# Altium PCB PCB_v1.PcbDoc
Units mil, origin at the board's own origin, x right, y up, seen from the top; angles counter-clockwise.
Board outline 3000 x 3500 mil, 2 copper layers (Top Layer, Bottom Layer); 63 components, 56 nets, 239 pads, 82 vias.
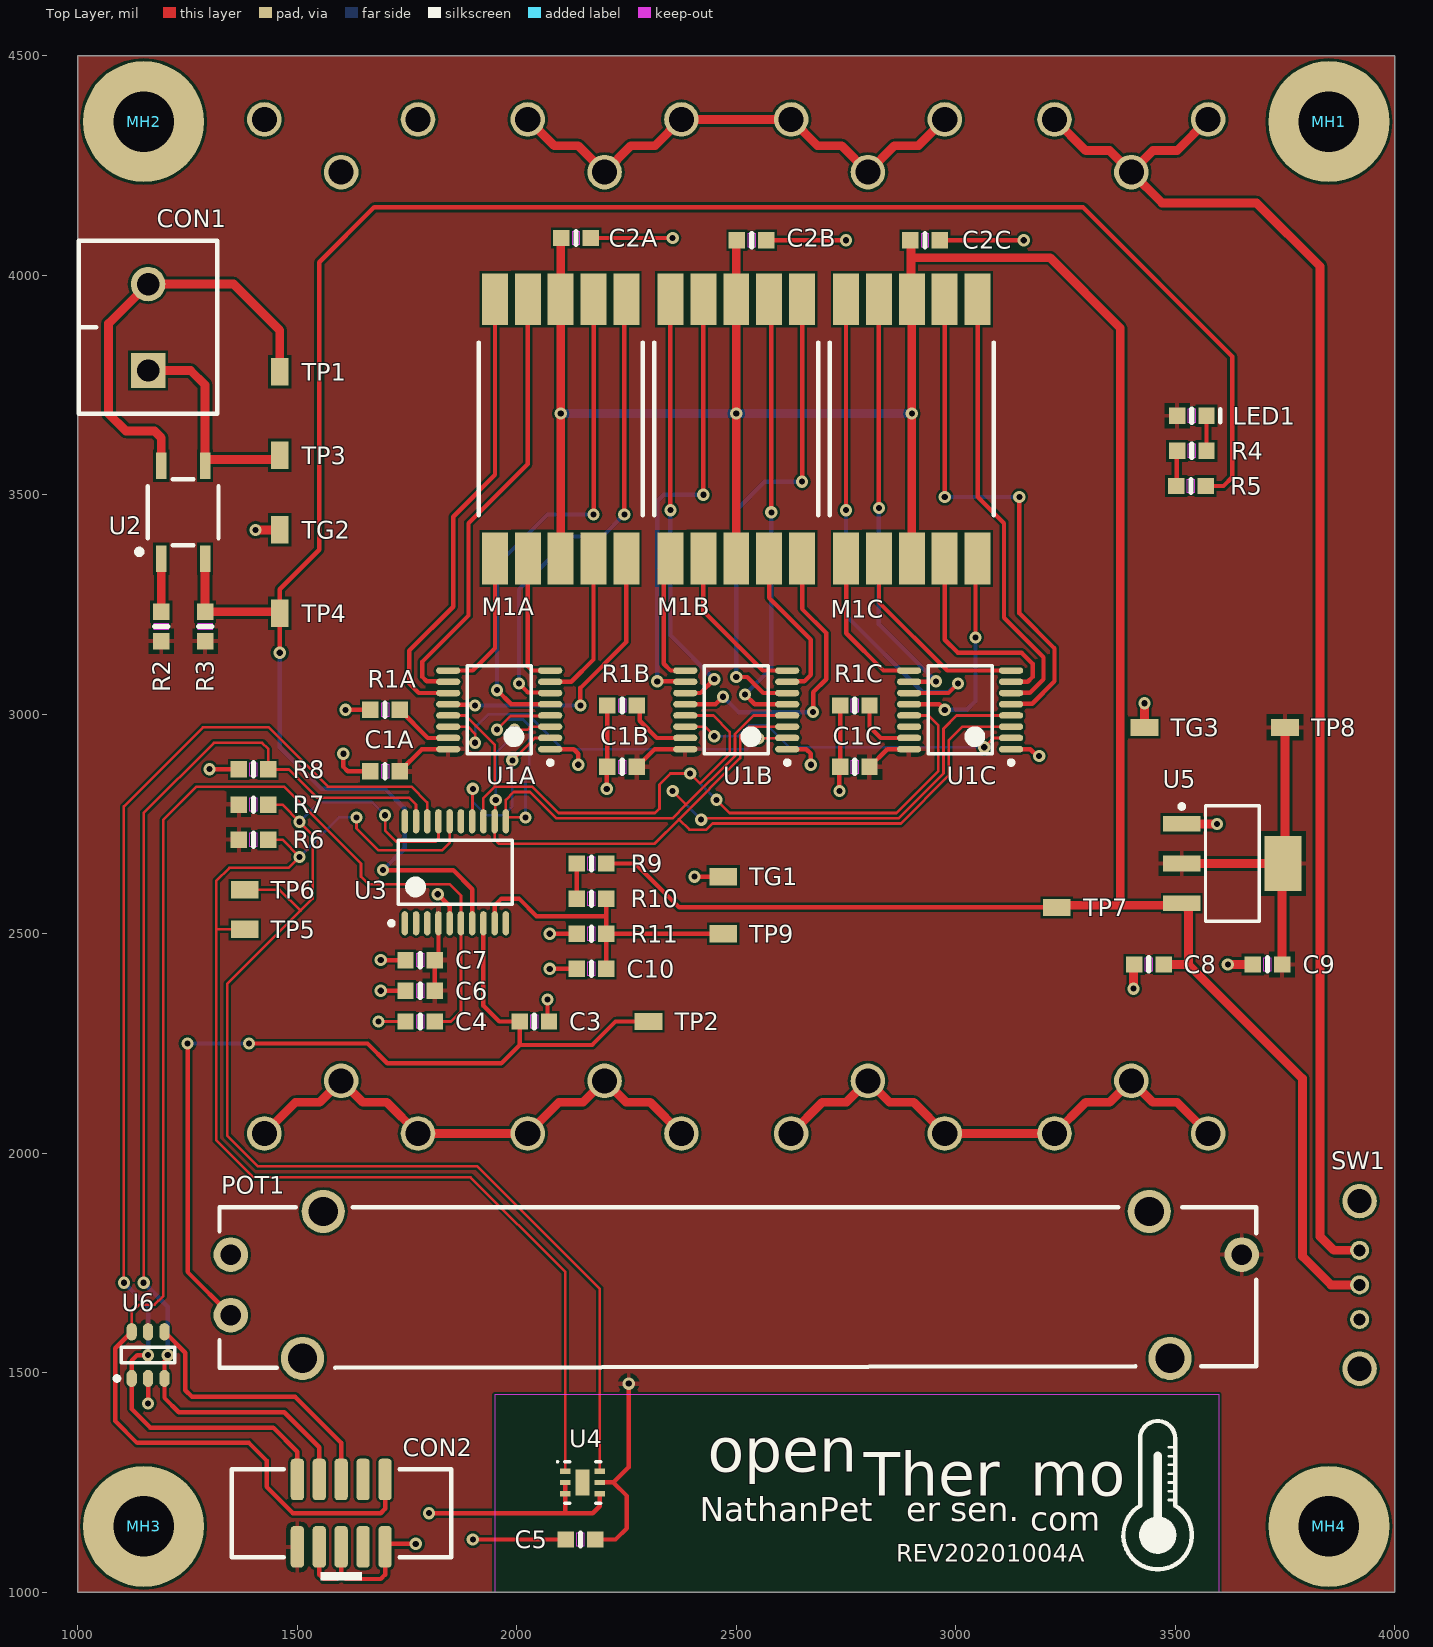
[diagram p0: Top Layer view]
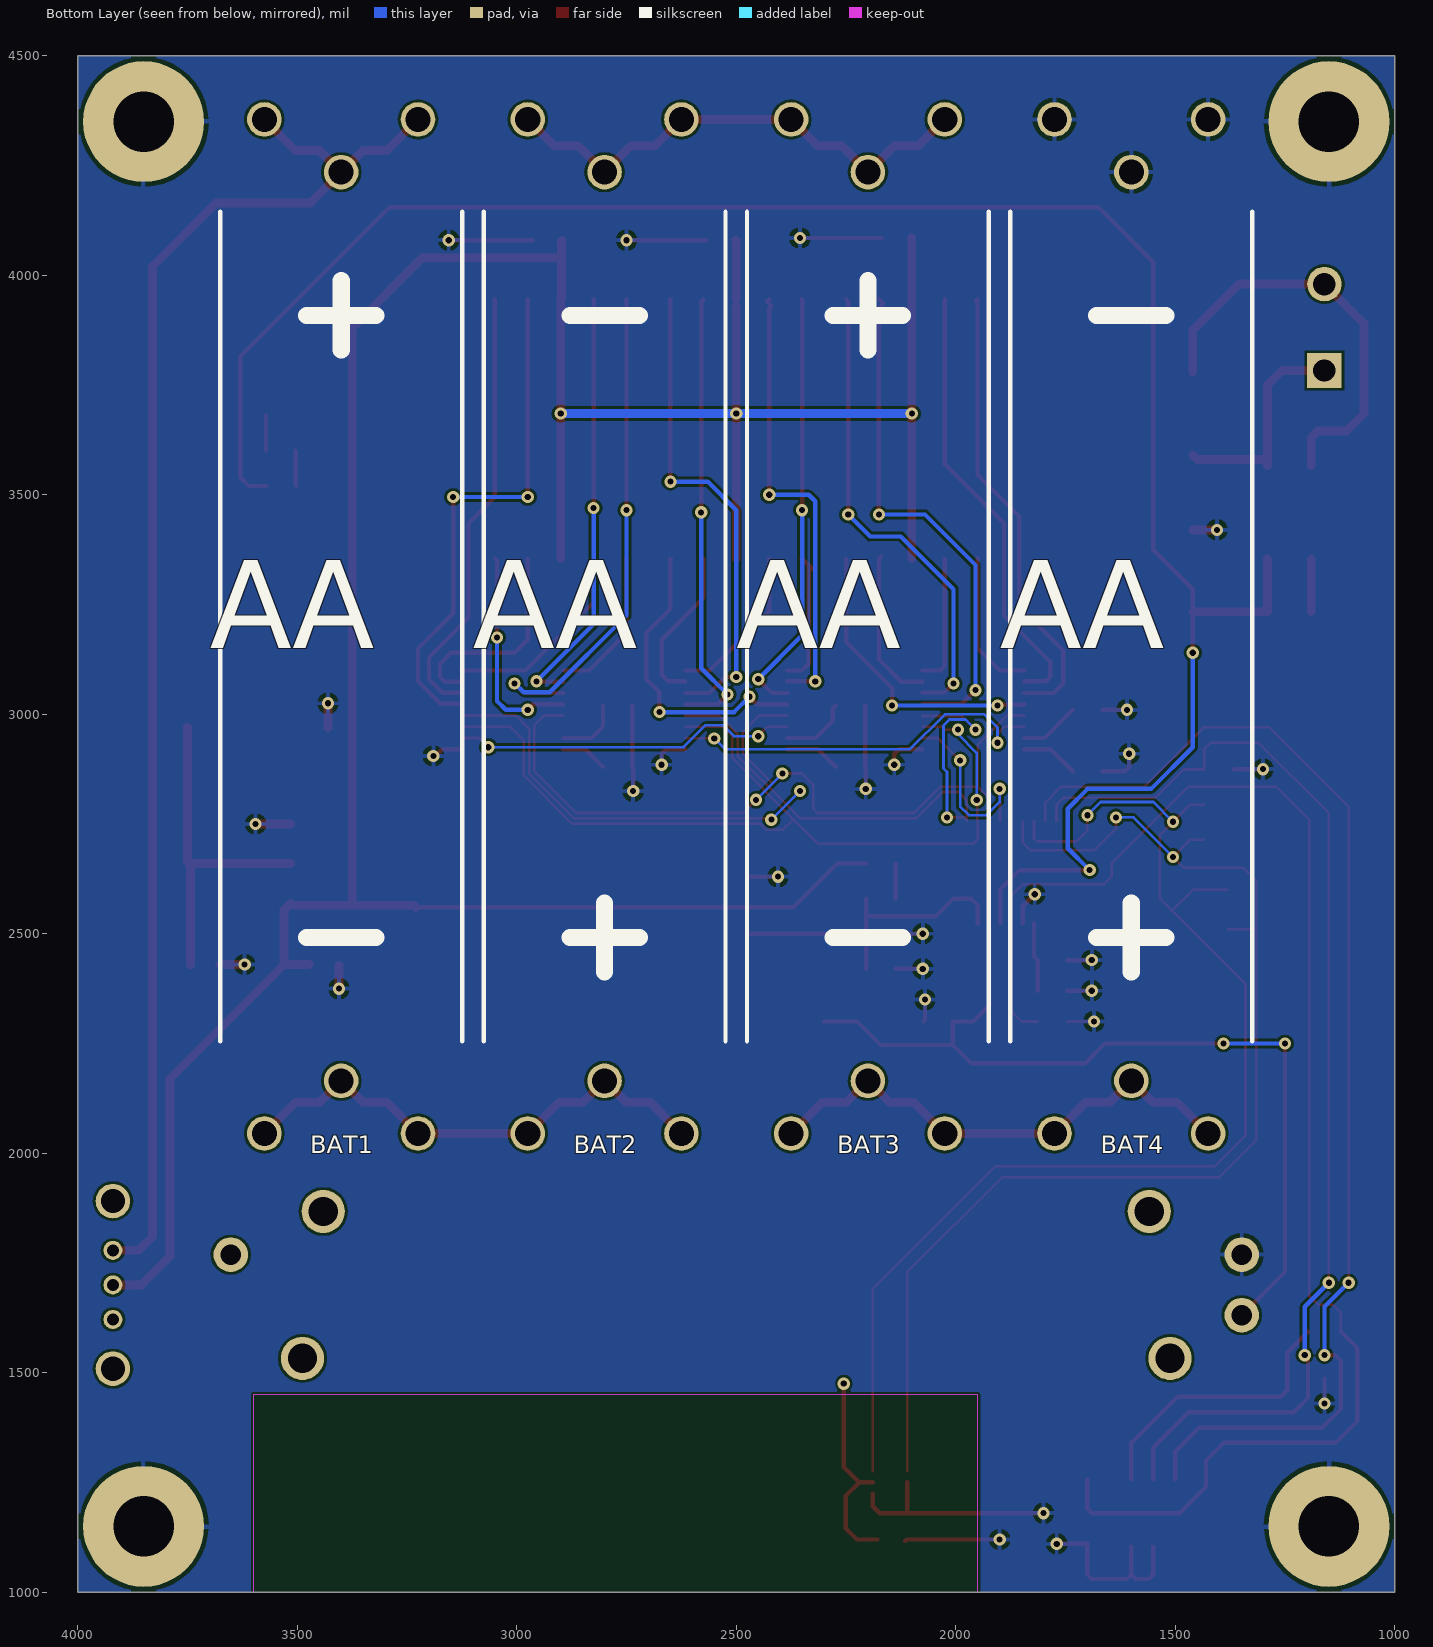
[diagram p1: Bottom Layer view, seen from below]
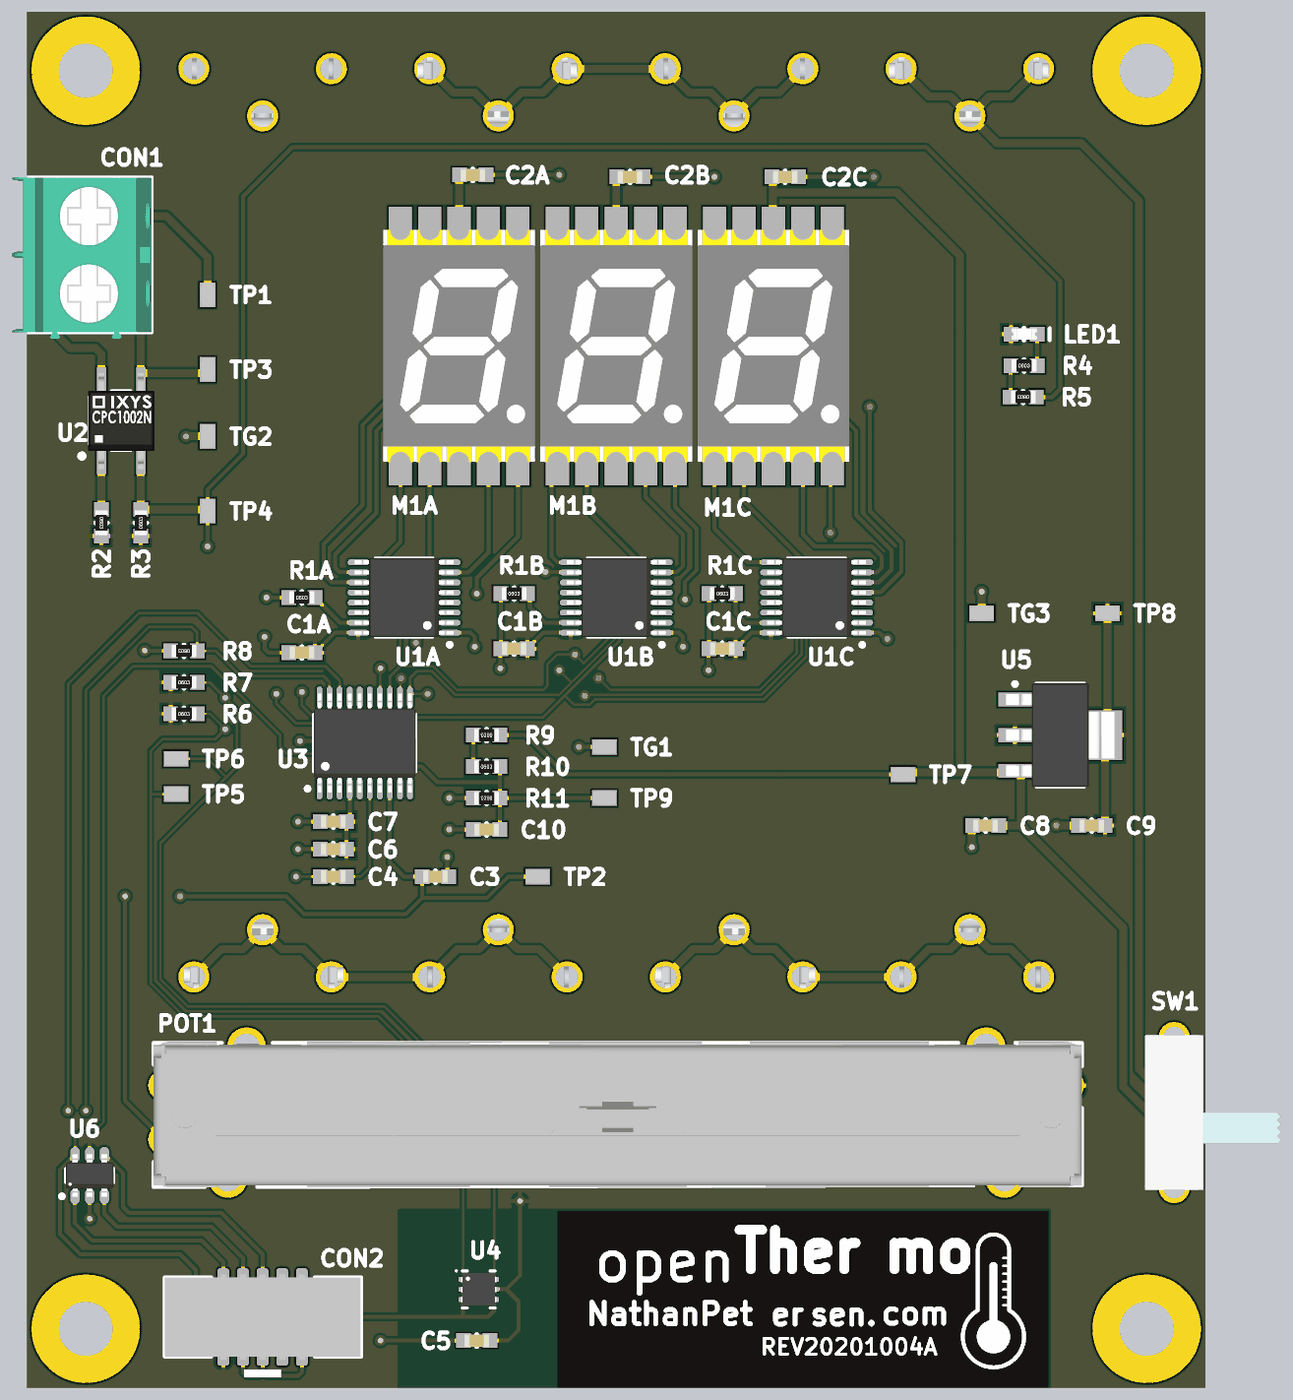
[diagram p2: 3D render of the assembled board from above, using the file's embedded part models]
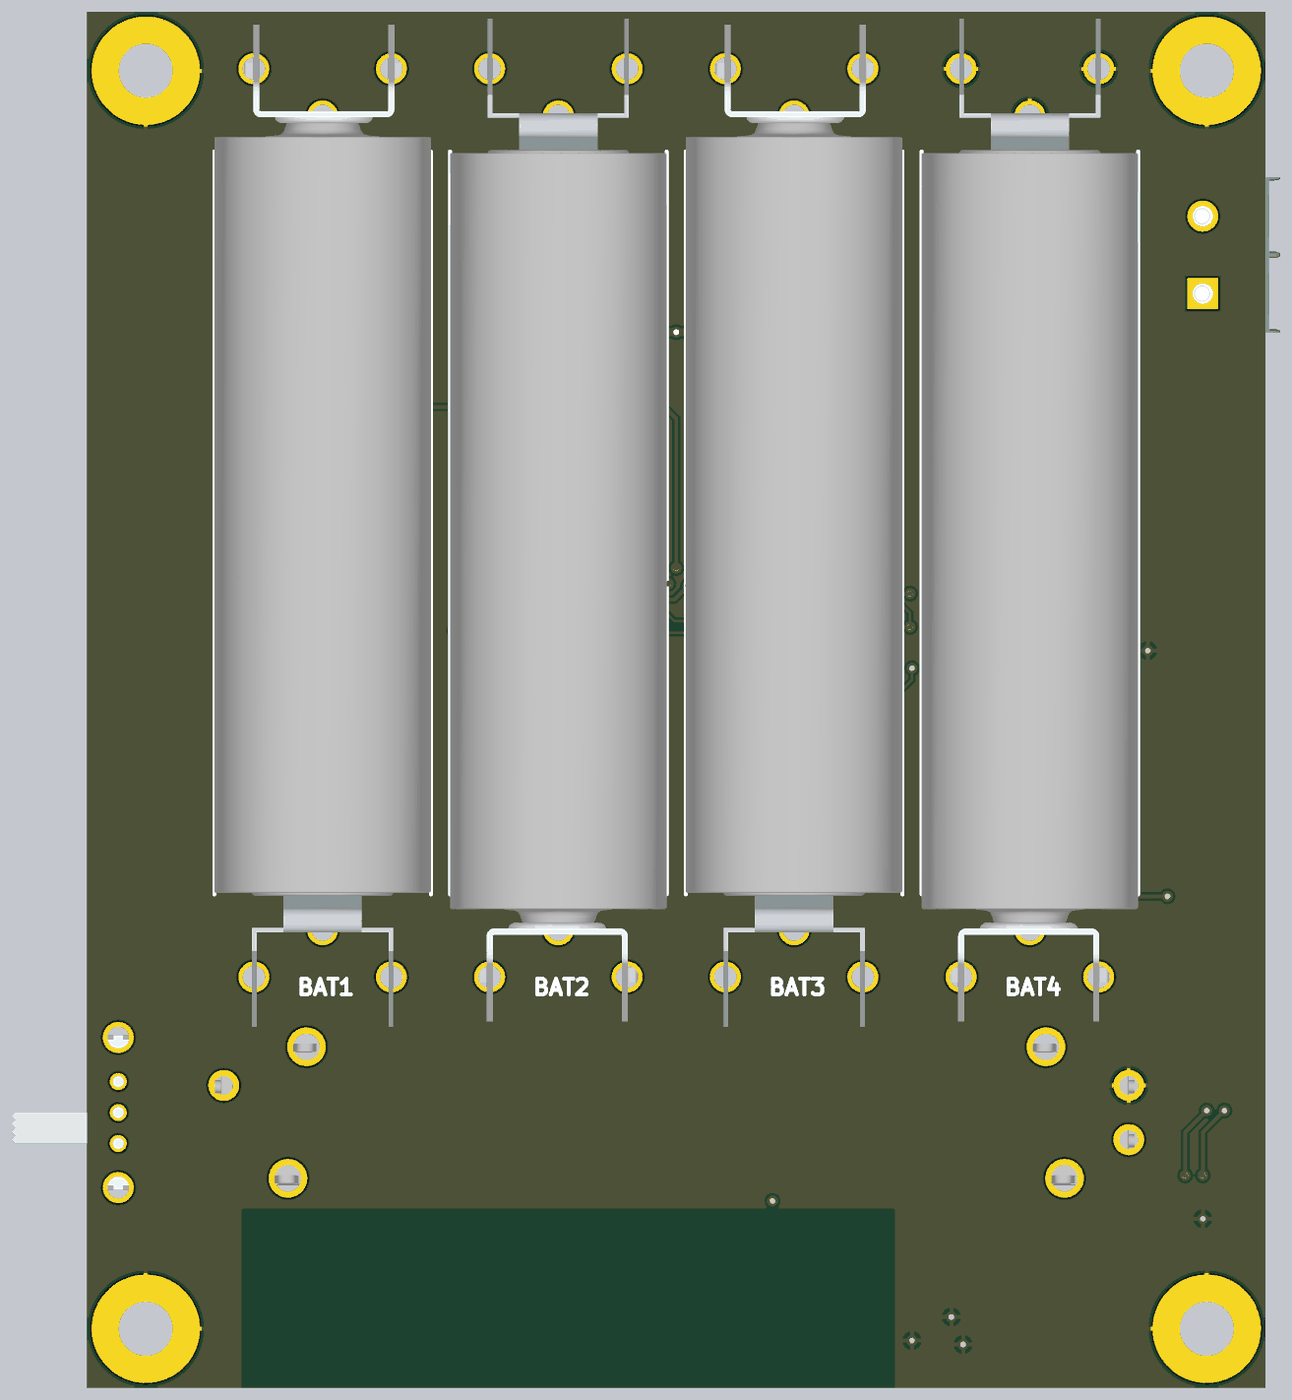
[diagram p3: 3D render of the assembled board from below, using the file's embedded part models]

## Layer stack, top to bottom
Top Solder: solder mask 0.4, Solder Resist, Dk 3.5
Top Layer: signal copper 1.4
Dielectric 1: dielectric 12.6, FR-4, Dk 4.8
Bottom Layer: signal copper 1.4
Bottom Solder: solder mask 0.4, Solder Resist, Dk 3.5

## Board outline
1000,1000 4000,1000 4000,4500 1000,4500

## Design rules (kind name [scope] priority, off if disabled: settings)
Clearance [All] p1: gap=6 ignorepadtopadclearanceinfootprint=FALSE
Height [All] p1: minheight=0 maxheight=5000 prefheight=500
HoleSize [All] p1: absolutevalues=TRUE maxlimit=250 minlimit=14 maxpercent=80.000 minpercent=20.000
MinimumSolderMaskSliver [All] p1: minsoldermaskwidth=6
PolygonConnect [All] p1: connectstyle=Relief reliefconductorwidth=10 reliefentries=4 polygonreliefangle="90 Angle" airgapwidth=10
RoutingVias [All] p1: holewidth=14 width=28 viastyle="Through Hole" minholewidth=14 minwidth=28 maxholewidth=28 maxwidth=50
SilkToSilkClearance [All] p1: silktosilkclearance=0
SilkToSolderMaskClearance [IsPad] p1: minsilkscreentomaskgap=6 clearancetoexposedcopper=TRUE
SolderMaskExpansion [All] p1: expansion=4
Width [All] p1: maxlimit=100 minlimit=6 preferedwidth=6
25 further rules are at their usual default settings.

## Classes and differential pairs
channel class LED_7_Seg: U_LED_7_Seg_0 U_LED_7_Seg_1 U_LED_7_Seg_2
component class U_LED_7_Seg_2: C1C C2C M1C R1C U1C
component class U_LED_7_Seg_1: C1B C2B M1B R1B U1B
component class U_LED_7_Seg_0: C1A C2A M1A R1A U1A
component class Schematic: BAT1 BAT2 BAT3 BAT4 C3 C4 C5 C6 C7 C8 C9 C10 CON1 CON2 LED1 MH1 MH2 MH3 MH4 POT1 R2 R3 R4 R5 R6 R7 R8 R9 R10 R11 SW1 TG1 TG2 TG3 TP1 TP2 TP3 TP4 TP5 TP6 TP7 TP8 TP9 U2 U3 U4 U5 U6

## Components (designator, comment, footprint, x,y, rotation, side; value= is the part's Value field where it differs from the comment)
BAT1 "AA" AA_BATTERY 3400,3200 r270 bottom locked
BAT2 "AA" AA_BATTERY 2800,3200 r90 bottom locked
BAT3 "AA" AA_BATTERY 2200,3200 r270 bottom locked
BAT4 "AA" AA_BATTERY 1600,3200 r90 bottom locked
C1A "Capacitor" 0603-CAP 1700,2870 r180 top value=0.1uF (schematic designator C1)
C1B "Capacitor" 0603-CAP 2240,2880 r180 top value=0.1uF (schematic designator C1)
C1C "Capacitor" 0603-CAP 2770,2880 r180 top value=0.1uF (schematic designator C1)
C2A "Capacitor" 0603-CAP 2135,4085 r0 top value=0.1uF (schematic designator C2)
C2B "Capacitor" 0603-CAP 2535,4080 r0 top value=0.1uF (schematic designator C2)
C2C "Capacitor" 0603-CAP 2930,4080 r0 top value=0.1uF (schematic designator C2)
C3 "Capacitor" 0603-CAP 2040,2300 r0 top value=10uF
C4 "Capacitor" 0603-CAP 1780,2300 r0 top value=0.1uF
C5 "Capacitor" 0603-CAP 2145,1120 r180 top value=0.1uF
C6 "Capacitor" 0603-CAP 1780,2370 r180 top value=0.1uF
C7 "Capacitor" 0603-CAP 1780,2440 r180 top value=10uF
C8 "Capacitor" 0603-CAP 3440,2430 r180 top value=10uF
C9 "Capacitor" 0603-CAP 3710,2430 r180 top value=10uF
C10 "Capacitor" 0603-CAP 2170,2420 r180 top value=0.1uF
CON1 "ScrewTerminal_1x2" 1935161 1160,3881.57 r90 top
CON2 "20021521-00010D4LF" 20021521-00010D4LF 1600,1180 r0 top
LED1 "RED" 0603-LED 3537.87,3680 r180 top
M1A "VDMR10A0" VDMR10A0 2100,3650 r0 top locked (schematic designator M1)
M1B "VDMR10A0" VDMR10A0 2500,3650 r0 top locked (schematic designator M1)
M1C "VDMR10A0" VDMR10A0 2900,3650 r0 top locked (schematic designator M1)
MH1 "M3" M3_HOLE 3850,4350 r0 top
MH2 "M3" M3_HOLE 1150,4350 r0 top
MH3 "M3" M3_HOLE 1150,1150 r0 top
MH4 "M3" M3_HOLE 3850,1150 r0 top
POT1 "PTA4543-2010CIB103" PTA4543-2010CIB103 2500,1700 r0 top locked value=10k
R1A "Resistor" 0603-RES 1700,3010 r0 top value=4k7 (schematic designator R1)
R1B "Resistor" 0603-RES 2240,3020 r0 top value=4k7 (schematic designator R1)
R1C "Resistor" 0603-RES 2770,3020 r0 top value=4k7 (schematic designator R1)
R2 "Resistor" 0603-RES 1190,3200 r270 top value=470
R3 "Resistor" 0603-RES 1290,3200 r90 top value=10k
R4 "Resistor" 0603-RES 3537.87,3600 r0 top value=1k
R5 "Resistor" 0603-RES 3535.75,3520 r180 top value=1k
R6 "Resistor" 0603-RES 1400,2714.25 r0 top value=4k7
R7 "Resistor" 0603-RES 1400,2794.25 r0 top value=4k7
R8 "Resistor" 0603-RES 1400,2874.25 r180 top value=10k
R9 "Resistor" 0603-RES 2170,2660 r180 top value=10k
R10 "Resistor" 0603-RES 2170,2580 r0 top value=10k
R11 "Resistor" 0603-RES 2170,2500 r180 top value=10k
SW1 "EG1213" EG1213 3920,1700 r90 top
TG1 "RCU-0C" RCU-0C 2470,2630 r90 top
TG2 "RCU-0C" RCU-0C 1460,3420 r0 top
TG3 "RCU-0C" RCU-0C 3430,2970 r90 top
TP1 "RCU-0C" RCU-0C 1460,3780 r0 top
TP2 "RCU-0C" RCU-0C 2300,2300 r90 top
TP3 "RCU-0C" RCU-0C 1460,3590 r0 top
TP4 "RCU-0C" RCU-0C 1460,3230 r0 top
TP5 "RCU-0C" RCU-0C 1380,2510 r90 top
TP6 "RCU-0C" RCU-0C 1380,2600 r90 top
TP7 "RCU-0C" RCU-0C 3230,2560 r90 top
TP8 "RCU-0C" RCU-0C 3750,2970 r90 top
TP9 "RCU-0C" RCU-0C 2470,2500 r90 top
U1A "STP08DP05TTR" TSOP65P640X120-16N 1960,3010 r180 top (schematic designator U1)
U1B "STP08DP05TTR" TSOP65P640X120-16N 2500,3010 r180 top (schematic designator U1)
U1C "STP08DP05TTR" TSOP65P640X120-16N 3010,3010 r180 top (schematic designator U1)
U2 "CPC1002NTR" CPC1002NTR 1240,3460 r0 top
U3 "STM32G030F6P6" TSOP65P640X120-20N 1860,2640 r90 top
U4 "TMP117MAIDRVR" SON65P200X80_HS-7N 2150,1250 r0 top
U5 "AP2114H-3.3TRG1" SOT230P700X180-4N 3630,2660 r0 top
U6 "NUP4114HMR6T1G" TSOP95P280X110-6N 1160,1540 r90 top

## Footprints (in the part's own frame and the unit in brackets; to place one, negate y for a bottom-side part, rotate by r counter-clockwise, add the part's x,y. Pads: shape width x height; smd on the part's side, far side on the other; paste and mask are expansions set on the pad)
0603-CAP [mm]
  rect 0.95x0.95 smd: 1(-0.85,0) 2(0.85,0)
  Top Layer keep-out region: -0.2,0.4 0.2,0.4 0.2,-0.4 -0.2,-0.4
  silkscreen extent 0,-0.38 0,0.38, body extent -0.8,-0.4 0.8,0.4, height 0.79
0603-LED [mm]
  rect 0.95x0.95 smd: A(0.85,0) C(-0.85,0)
  Top Layer keep-out region: -0.2,0.4 0.2,0.4 0.2,-0.4 -0.2,-0.4
  silkscreen extent -1.65,-0.38 0,0.38, body extent -0.83,-0.37 0.82,0.81, height 0.8
0603-RES [mm]
  rect 0.95x0.95 smd: 1(-0.85,0) 2(0.85,0)
  Top Layer keep-out region: -0.2,0.4 0.2,0.4 0.2,-0.4 -0.2,-0.4
  silkscreen extent 0,-0.38 0,0.38, body extent -0.8,-0.4 0.8,0.4, height 0.44
1935161 [mm] "TERM BLOCK PCB 2POS 5.0MM GREEN"
  rect 2x2 hole 1.3: 1(-2.5,0)
  round 2 hole 1.3: 2(2.5,0)
  silkscreen extent -5,-4 5,4, body extent -5.4,-4 5,5, height 11.5
20021521-00010D4LF [mm] "CONN HEADER SMD 10POS 1.27MM"
  rrect50% 0.76x2.4 smd: 1(-2.54,-1.95) 2(-2.54,1.95) 3(-1.27,-1.95) 4(-1.27,1.95) 5(0,-1.95) 6(0,1.95) 7(1.27,-1.95) 8(1.27,1.95) 9(2.54,-1.95) 10(2.54,1.95)
  silkscreen extent -6.32,-3.9 6.38,2.55, body extent -6.32,-2.75 6.33,2.75, height 5.65
AA_BATTERY [mm]
  round 2 hole 1.45: 1(-29.34,-4.445) 1(-29.34,4.445) 1(-26.29,0) 2(26.29,0) 2(29.34,-4.445) 2(29.34,4.445)
  silkscreen extent -24,-7 24,7, body extent -32.2,-7 32.56,7, height 14
CPC1002NTR [mm] "SSR RELAY SPST-NO 700MA 0-60V"
  rect 0.6x1.54 smd: 1(-1.27,-2.695) 2(1.27,-2.695) 3(1.27,2.695) 4(-1.27,2.695)
  silkscreen extent -2.69,-2.44 2.04,1.91, body extent -2.14,-3.12 2.15,3.07, height 2.18
EG1213 [mm] "SWITCH SLIDE SPDT 200MA 30V"
  round 1.1 hole 0.7: 1(-2,0) 2(0,0) 3(2,0)
  round 2 hole 1.4: SH(-4.85,0) SH(4.85,0)
  body extent -5,-6.9 5,1.9, height 5
M3_HOLE [mm]
  round 7 hole 3.5: 1(0,0)
PTA4543-2010CIB103 [mm] "SLIDE POT 10K OHM 0.25W TOP 45MM"
  round 2 hole 1.2: 1(-29.25,1.75) 2(-29.25,-1.75) 3(29.25,1.75)
  round 2.5 hole 1.7: SH(-25.1,-4.25) SH(-23.9,4.25) SH(23.9,4.25) SH(25.1,-4.25)
  silkscreen extent -29.9,-4.8 30.1,4.5, body extent -29.9,-8.37 30.1,6.17, height 17.09
RCU-0C [mm] "0603 PROBE PAD"
  rect 1x1.6 smd: 1(0,0)
  body extent -0.44,-0.8 0.46,0.8, height 1.12
SON65P200X80_HS-7N [mm] "SON, 6-Leads, Body 2.00x2.00mm, Pitch 0.65mm, Thermal Pad 1.60x0.89mm, IPC Medium Density"
  rect 0.6x0.3 smd mask+0.05: 1(-0.995,0.65) 2(-0.995,0) 3(-0.995,-0.65) 4(0.995,-0.65) 5(0.995,0) 6(0.995,0.65)
  rect 0.8x1.5 smd mask+0.05: 7(0,0)
  silkscreen extent -1.5,-1.2 1.05,1.25, body extent -1.13,-1.05 1.13,1.05, height 0.8
SOT230P700X180-4N [mm] "SOT223, 4-Leads, Body 6.50x7.00mm (avg), Pitch 2.30mm, IPC Medium Density"
  rect 2.15x0.9 smd: 1(-2.925,2.3) 2(-2.925,0) 3(-2.925,-2.3)
  rect 2.15x3.2 smd: 4(2.925,0)
  silkscreen extent -3.05,-3.35 1.55,3.42, body extent -3.5,-3.35 3.5,3.35, height 1.8
TSOP65P640X120-16N [mm] "TSOP, 16-Leads, Body 5.00x4.40mm, Pitch 0.65mm, IPC Medium Density"
  oval 1.4x0.375 smd mask+0.05: 1(-2.95,2.275) 2(-2.95,1.625) 3(-2.95,0.975) 4(-2.95,0.325) 5(-2.95,-0.325) 6(-2.95,-0.975) 7(-2.95,-1.625) 8(-2.95,-2.275) 9(2.95,-2.275) 10(2.95,-1.625) 11(2.95,-0.975) 12(2.95,-0.325) 13(2.95,0.325) 14(2.95,0.975) 15(2.95,1.625) 16(2.95,2.275)
  silkscreen extent -3.08,-2.55 1.85,3.17, body extent -3.2,-2.55 3.2,2.55, height 1.2
TSOP65P640X120-20N [mm] "TSOP, 20-Leads, Body 6.50x4.40mm, Pitch 0.65mm, IPC Medium Density"
  oval 1.4x0.375 smd mask+0.05: 1(-2.95,2.925) 2(-2.95,2.275) 3(-2.95,1.625) 4(-2.95,0.975) 5(-2.95,0.325) 6(-2.95,-0.325) 7(-2.95,-0.975) 8(-2.95,-1.625) 9(-2.95,-2.275) 10(-2.95,-2.925) 11(2.95,-2.925) 12(2.95,-2.275) 13(2.95,-1.625) 14(2.95,-0.975) 15(2.95,-0.325) 16(2.95,0.325) 17(2.95,0.975) 18(2.95,1.625) 19(2.95,2.275) 20(2.95,2.925)
  silkscreen extent -3.07,-3.3 1.85,3.82, body extent -3.2,-3.3 3.2,3.3, height 1.2
TSOP95P280X110-6N [mm] "TSOP, 6-Leads, Body 3.00x1.50mm, Pitch 0.95mm, IPC Medium Density"
  oval 1x0.6 smd mask+0.051: 1(-1.35,0.95) 2(-1.35,0) 3(-1.35,-0.95) 4(1.35,-0.95) 5(1.35,0) 6(1.35,0.95)
  silkscreen extent -1.47,-1.55 0.45,1.92, body extent -1.38,-1.55 1.38,1.55, height 1.1
VDMR10A0 [mm] "DISPLAY 7SEG 0.39\" SGL RED 10SMD"
  rect 1.5x3 smd: 1(-3.8,-7.5) 2(-1.9,-7.5) 3(0,-7.5) 4(1.9,-7.5) 5(3.8,-7.5) 6(3.8,7.5) 7(1.9,7.5) 8(0,7.5) 9(-1.9,7.5) 10(-3.8,7.5)
  silkscreen extent -4.75,-5 4.75,5, body extent -4.9,-7.5 4.9,7.5, height 3.84

## Part data
BAT1 BAT2 BAT3 BAT4: library part AA_BATTERY, "AA BATTERY", Supplier Part Number 1=36-590-ND, Supplier 1=Digi-Key, Supplier Part Number 2=36-596-ND
C1A C1B C1C C2A C2B C2C C4 C5 C6 C10: Supplier Part Number 1=311-1343-1-ND, Supplier 1=Digi-Key
C3 C7 C8 C9: Supplier Part Number 1=1276-1192-1-ND, Supplier 1=Digi-Key
CON1: Supplier Part Number 1=277-1667-ND, Supplier 1=Digi-Key
CON2: "CONN HEADER SMD 10POS 1.27MM", Supplier Part Number 1=609-6533-ND, Supplier 1=Digi-Key
LED1: library part LED, Supplier Part Number 1=160-1447-6-ND, Supplier 1=Digi-Key
M1A M1B M1C: "DISPLAY 7SEG 0.39\" SGL RED 10SMD", Supplier Part Number 1=VDMR10A0CT-ND, Supplier 1=Digi-Key
MH1 MH2 MH3 MH4: library part M3_HOLE, "M3 MOUNTING HOLE"
POT1: "SLIDE POT 10K OHM 0.25W TOP 45MM", Supplier Part Number 1=PTA4543-2010CIB103-ND, Supplier 1=Digi-Key
R1A R1B R1C R6 R7: Supplier Part Number 1=YAG1304CT-ND, ComponentLink1Description=https://www.seielect.com/catalog/SEI-RMCF_RMCP.pdf?src-supplier=Avnet, ComponentLink1URL=https://www.seielect.com/catalog/SEI-RMCF_RMCP.pdf?src-supplier=Avnet, ComponentLink2Description=http://components.arrow.com/part/dataview/50497142S181428N1174?src-supplier=Arrow, ComponentLink2URL=http://components.arrow.com/part/dataview/50497142S181428N1174?src-supplier=Arrow, ComponentLink3Description=https://www.seielect.com/catalog/SEI-Packaging.pdf?src-supplier=Digi-Key, ComponentLink3URL=https://www.seielect.com/catalog/SEI-Packaging.pdf?src-supplier=Digi-Key, Supplier 1=Digi-Key
R2: Supplier Part Number 1=311-470HRCT-ND, ComponentLink1Description=https://www.seielect.com/catalog/SEI-RMCF_RMCP.pdf?src-supplier=Avnet, ComponentLink1URL=https://www.seielect.com/catalog/SEI-RMCF_RMCP.pdf?src-supplier=Avnet, ComponentLink2Description=http://components.arrow.com/part/dataview/50497142S181428N1174?src-supplier=Arrow, ComponentLink2URL=http://components.arrow.com/part/dataview/50497142S181428N1174?src-supplier=Arrow, ComponentLink3Description=https://www.seielect.com/catalog/SEI-Packaging.pdf?src-supplier=Digi-Key, ComponentLink3URL=https://www.seielect.com/catalog/SEI-Packaging.pdf?src-supplier=Digi-Key, Supplier 1=Digi-Key
R3 R8 R9 R10 R11: Supplier Part Number 1=311-10.0KHRCT-ND, ComponentLink1Description=https://www.seielect.com/catalog/SEI-RMCF_RMCP.pdf?src-supplier=Avnet, ComponentLink1URL=https://www.seielect.com/catalog/SEI-RMCF_RMCP.pdf?src-supplier=Avnet, ComponentLink2Description=http://components.arrow.com/part/dataview/50497142S181428N1174?src-supplier=Arrow, ComponentLink2URL=http://components.arrow.com/part/dataview/50497142S181428N1174?src-supplier=Arrow, ComponentLink3Description=https://www.seielect.com/catalog/SEI-Packaging.pdf?src-supplier=Digi-Key, ComponentLink3URL=https://www.seielect.com/catalog/SEI-Packaging.pdf?src-supplier=Digi-Key, Supplier 1=Digi-Key
R4 R5: Supplier Part Number 1=311-1.00KHRCT-ND, ComponentLink1Description=https://www.seielect.com/catalog/SEI-RMCF_RMCP.pdf?src-supplier=Avnet, ComponentLink1URL=https://www.seielect.com/catalog/SEI-RMCF_RMCP.pdf?src-supplier=Avnet, ComponentLink2Description=http://components.arrow.com/part/dataview/50497142S181428N1174?src-supplier=Arrow, ComponentLink2URL=http://components.arrow.com/part/dataview/50497142S181428N1174?src-supplier=Arrow, ComponentLink3Description=https://www.seielect.com/catalog/SEI-Packaging.pdf?src-supplier=Digi-Key, ComponentLink3URL=https://www.seielect.com/catalog/SEI-Packaging.pdf?src-supplier=Digi-Key, Supplier 1=Digi-Key
SW1: "SWITCH SLIDE SPDT 200MA 30V", Supplier Part Number 1=EG1906-ND, Supplier 1=Digi-Key
TG1 TG2 TG3 TP1 TP2 TP3 TP4 TP5 TP6 TP7 TP8 TP9: library part CMP-2000-05575-1, "PC TEST POINT NATURAL", Supplier Part Number 1=A106145CT-ND, ComponentLink1Description=https://datasheet.ciiva.com/2917/5000-5004-2917632.pdf?src-supplier=Digi-Key, ComponentLink1URL=https://datasheet.ciiva.com/2917/5000-5004-2917632.pdf?src-supplier=Digi-Key, ComponentLink2Description=https://datasheet.ciiva.com/16507/m60-2p60-16507925.pdf?src-supplier=Future+Electronics, ComponentLink2URL=https://datasheet.ciiva.com/16507/m60-2p60-16507925.pdf?src-supplier=Future+Electronics, ComponentLink3Description=https://datasheet.ciiva.com/1454/1703983-1454827.pdf?src-supplier=Element14, ComponentLink3URL=https://datasheet.ciiva.com/1454/1703983-1454827.pdf?src-supplier=Element14, Supplier 1=Digi-Key
U1A U1B U1C: "IC LED DRIVER LIN 100MA 16TSSOP", Supplier Part Number 1=497-6029-1-ND, Supplier 1=Digi-Key
U2: "SSR RELAY SPST-NO 700MA 0-60V", Supplier Part Number 1=CLA230CT-ND, Supplier 1=Digi-Key
U3: "ARM MICROCONTROLLERS - MCU", Supplier Part Number 1=497-STM32G030F6P6-ND, Supplier 1=Digi-Key
U4: "TEMPERATURE SENSOR", Supplier Part Number 1=296-51835-1-ND, Supplier 1=Digi-Key
U5: "IC REG LINEAR 3.3V 1A SOT223", Supplier Part Number 1=AP2114H-3.3TRG1DICT-ND, Supplier 1=Digi-Key
U6: "TVS DIODE 5.5V 10V 6TSOP", Supplier Part Number 1=NUP4114HMR6T1GOSCT-ND, Supplier 1=Digi-Key

## Via types
v1: diameter 28, hole 14, Top Layer to Bottom Layer, tented both sides, 82 vias

## Nets (pads, with @x,y where several pads share a name; then routed paths per layer and width w, separated by ;. In a path a pad name is that pad's centre, name@x,y a point inside that pad or via, vN(x,y) a via of type N, cw(c..) or ccw(c..) an arc to the next point about the centre after c; other vN are vias at no path point)
3V3: C1A.1 C1B.1 C1C.1 C5.1 C6.1 C7.1 C9.1 CON2.1 LED1.A POT1.3 R2.2 R3.1 R6.1 R7.1 TP8.1 U1A.16 U1B.16 U1C.16 U3.4 U4.5 U5.2 U5.4 U6.5 | length 1762.8
  Top Layer w10: C1A.1 1783.9,2920.43 U1A.16 ; C6.1 C7.1 1821.61,2448.15 U3.4 ; C5.1 2225,1120 2250.86,1145.86 2250.86,1219.14 2220,1250 ; U4.5 2220,1250 ; v1(2255,1475) 2255,1285 2220,1250 ; C1B.1 2313.9,2920.43 U1B.16 ; C1C.1 2843.9,2920.43 U1C.16
  Top Layer w20: U5.2 3741.77,2660 3743.46,2658.31 C9.1 ; U5.4 3750,2664.84 TP8.1
CLK: U1A.3 U1B.3 U1C.3 U3.12 | length 2073.3
  Top Layer w6: v1(1952.16,2804.63) 1950.86,2803.34 1950.86,2757.44 U3.12 1949.57,2715.43 1960,2705 2313.94,2705 2369.47,2760.53 ; v1(1995,2965) 2025,2965 2031.61,2971.61 U1A.3 ; U1B.3 2530.58,2971.61 2509,2950.03 2509,2900.06 2369.47,2760.53 ; U1C.3 3015.61,2971.61 2984,2940 2984,2860.06 2874.94,2751 2446,2751 2432,2737 2393,2737 2369.47,2760.53
  Bottom Layer w6: v1(1952.16,2804.63) 1952.16,2912.16 1995,2955 v1(1995,2965)
GND: BAT4.2 C1A.2 C1B.2 C1C.2 C2A.2 C2B.2 C2C.2 C3.2 C4.1 C5.2 C6.2 C7.2 C8.2 C9.2 C10.2 CON2.3 CON2.5 CON2.9 MH1.1 MH2.1 MH3.1 MH4.1 POT1.1 R1A.1 R1B.1 R1C.1 R8.2 R11.2 TG1.1 TG2.1 TG3.1 U1A.1 U1B.1 U1C.1 U3.5 U4.2 U4.3 U4.4 U5.1 U6.2 | length 3406.6
  Top Layer w6: v1(1685,2300) C4.1
  Top Layer w10: v1(1160,1430) U6.2 ; v1(1300,2875) 1365.79,2875 R8.2 ; CON2.3 1550,1040 1560,1030 1590,1030 1600,1040 ; CON2.5 1600,1040 ; v1(1605,2910) 1605,2880 1615,2870 C1A.2 ; v1(1610,3010) R1A.1 ; v1(1690,2370) C6.2 ; v1(1690,2440) C7.2 ; v1(1770,1110) 1700,1110 CON2.9 1700,1040 1690,1030 1610,1030 1600,1040 ; v1(1800,1180) 2110,1180 ; v1(1820,2590) 1847.2,2562.8 U3.5 ; v1(1900,1120) C5.2 C5.2@2115,1116.54 ; v1(2070,2350) 2070,2303.46 C3.2 ; v1(2075,2420) C10.2 ; v1(2075,2500) R11.2 ; U1A.1 2129.57,2920.43 2140,2910 v1(2140,2885) ; U4.2 U4.3 2110.41,1224 2110.41,1180.41 2110,1180 ; C2A.2 v1(2355,4085) ; U4.4 2189.17,1195.83 2173.35,1180 2110,1180 ; v1(2205,2830) 2205,2878.46 C1B.2 R1B.1 ; v1(2405,2630) TG1.1 ; C2B.2 v1(2750,4080) ; U1B.1 2659.57,2920.43 2670,2910 v1(2670,2885) ; v1(2735,2825) 2735,2878.46 C1C.2 R1C.1 ; C2C.2 v1(3155,4080) ; U1C.1 3169.7,2920.43 3185.13,2905 v1(3190,2905) ; C8.2@3405,2428.46 C8.2
  Top Layer w20: v1(1405,3420) TG2.1 ; v1(3405,2375) C8.2@3405,2428.46 ; TG3.1 v1(3430,3025) ; U5.1 3515.39,2750 v1(3595,2750) ; v1(3620,2430) C9.2
I2C2_SCL: R6.2 TP5.1 U3.16 U4.1 | length 2810.8
  Top Layer w6: TP5.1 1315,2510 ; R6.2 1465.75,2714.25 v1(1505,2675) 1480,2650 1345,2650 1315,2620 1315,2510 ; v1(1635,2765) 1635,2740 1685,2690 1830,2690 1847.2,2707.2 U3.16 ; U4.1 2110.83,1729.17 1895,1945 1400,1945 1315,2030 1315,2510
  Bottom Layer w6: v1(1505,2675) 1595,2765 v1(1635,2765)
I2C2_SDA: R7.2 TP6.1 U3.17 U4.6 | length 2887.5
  Top Layer w6: TP6.1 1460,2600 1507.5,2552.5 ; R7.2 1465.75,2794.25 v1(1505,2755) 1535,2725 1535,2580 1507.5,2552.5 ; v1(1700,2770) 1700,2735 1725,2710 1815,2710 1821.61,2716.61 U3.17 ; U4.6 2189.17,1690.83 1910,1970 1410,1970 1340,2040 1340,2385 1507.5,2552.5
  Bottom Layer w6: v1(1505,2755) 1550,2800 1670,2800 v1(1700,2770)
LE: U1A.4 U1B.4 U1C.4 U3.11 | length 2330.5
  Top Layer w6: v1(1955,2965) 1986.1,2996.1 2075.04,2996.1 U1A.4 ; U3.11 U3.11@1975.16,2760.5 ; v1(2020,2765) 1979.66,2765 U3.11@1975.16,2760.5 ; v1(2355,2825) 2385.99,2794.01 ; v1(2420,2760) 2423,2763 2869.97,2763 2972,2865.03 2972,2967 3002.2,2997.2 U1C.4 ; U1B.4 2539.2,2997.2 2497,2955 2497,2905.03 2385.99,2794.01 ; U3.11@1975.16,2760.5 1975.16,2805.16 1993,2823 2030.03,2823 2090.03,2763 2354.97,2763 2385.99,2794.01
  Bottom Layer w6: v1(1955,2965) 1978,2988 2014.53,2988 2028,2974.53 2028,2876.74 2020,2868.74 v1(2020,2765) ; v1(2355,2825) v1(2420,2760)
NetBAT1_1: BAT1.1 SW1.3 | length 3281.5
  Top Layer w20: BAT1.1@3225,4355.12 3296.03,4284.09 3350.95,4284.09 BAT1.1@3400,4235.04 ; BAT1.1@3575,4355.12 3503.97,4284.09 3449.05,4284.09 BAT1.1@3400,4235.04 ; SW1.3 3861.26,1778.74 3830,1810 3830,4020 3685,4165 3470.04,4165 BAT1.1@3400,4235.04
NetBAT1_2: BAT1.2 BAT2.1 | length 1149
  Top Layer w20: BAT2.1@2625,2044.88 2696.03,2115.91 2750.95,2115.91 2800,2164.96 2849.05,2115.91 2903.97,2115.91 2975,2044.88 3225,2044.88 3296.03,2115.91 3350.95,2115.91 3400,2164.96 3449.05,2115.91 3503.97,2115.91 BAT1.2@3575,2044.88
NetBAT2_2: BAT2.2 BAT3.1 | length 1149
  Top Layer w20: BAT3.1@2025,4355.12 2085.12,4295 2140.04,4295 2200,4235.04 2259.96,4295 2314.88,4295 2375,4355.12 2625,4355.12 2685.12,4295 2740.04,4295 2800,4235.04 2859.96,4295 2914.88,4295 BAT2.2@2975,4355.12
NetBAT3_2: BAT3.2 BAT4.1 | length 1149
  Top Layer w20: BAT4.1@1425,2044.88 1496.03,2115.91 1550.95,2115.91 1600,2164.96 1649.05,2115.91 1703.97,2115.91 1775,2044.88 2025,2044.88 2096.03,2115.91 2150.95,2115.91 2200,2164.96 2249.05,2115.91 2303.97,2115.91 BAT3.2@2375,2044.88
NetCON1_1: CON1.1 TP3.1 U2.3 | length 502.4
  Top Layer w20: CON1.1 1256.85,3783.15 1290,3750 U2.3@1290,3578.5 ; U2.3 U2.3@1290,3578.5 ; TP3.1 1450.31,3580.31 1291.81,3580.31 U2.3@1290,3578.5
NetCON1_2: CON1.2 TP1.1 U2.4 | length 977.5
  Top Layer w20: U2.4 1190,3630 1175,3645 1110,3645 1070,3685 1070,3890 CON1.2 1355,3980 1460,3875 TP1.1
NetLED1_C: LED1.C R4.2 | length 80
  Top Layer w10: R4.2 LED1.C
NetM1A_1: M1A.1 U1A.9 | length 332.5
  Top Layer w10: U1A.9 1899.57,3099.57 1950.39,3150.39 M1A.1 M1A.1@1950,3355.12
NetM1A_2: M1A.2 U1A.8 | length 300.4
  Top Layer w10: M1A.2@2025,3354.92 M1A.2 2025.2,3109.8 2035.43,3099.57 U1A.8
NetM1A_4: M1A.4 U1A.7 | length 356.4
  Top Layer w10: U1A.7 2123.98,3073.98 2174.8,3124.8 M1A.4 M1A.4@2170,3359.53
NetM1A_5: M1A.5 U1A.12 | length 680.4
  Top Layer w10: U1A.12 1845.15,3021.51 1903.49,3021.51 v1(1905,3020) ; v1(2145,3020) 2145,3060 2249.61,3164.61 M1A.5
  Bottom Layer w10: v1(1905,3020) v1(2145,3020)
NetM1A_6: M1A.6 U1A.6 | length 1098
  Top Layer w10: v1(2005,3070) 2025.33,3049.67 2074.85,3049.67 U1A.6 ; v1(2245,3455) 2245,3939.88 2250,3944.88 M1A.6
  Bottom Layer w10: v1(2005,3070) 2005,3285 2125,3405 2195,3405 v1(2245,3455)
NetM1A_7: M1A.7 U1A.5 | length 1185.6
  Top Layer w10: v1(1955,3055) 1987.2,3022.8 U1A.5 ; M1A.7 2165,3935.47 2175,3925.47 v1(2175,3455)
  Bottom Layer w10: v1(1955,3055) 1955,3340 2070,3455 v1(2175,3455)
NetM1A_9: M1A.9 U1A.10 | length 1023.2
  Top Layer w10: U1A.10 1842.57,3075.26 1794.74,3075.26 1785,3085 1785,3120 1890,3225 1890,3435 2025,3570 2025,3945.08 M1A.9
NetM1A_10: M1A.10 U1A.11 | length 1060.5
  Top Layer w10: U1A.11 1776.61,3048.39 1755,3070 1755,3145 1855,3245 1855,3450 1950.39,3545.39 M1A.10 M1A.10@1955,3940.67
NetM1B_1: M1B.1 U1B.9 | length 314.3
  Top Layer w10: M1B.1@2325.87,3330.2 M1B.1@2335,3339.33 ; M1B.1 M1B.1@2335,3339.33 ; U1B.9 2350.43,3099.57 2335,3115 M1B.1@2335,3339.33
NetM1B_2: M1B.2 U1B.8 | length 366.9
  Top Layer w10: M1B.2 2425.2,3234.8 2560.43,3099.57 U1B.8
NetM1B_4: M1B.4 U1B.7 | length 364.9
  Top Layer w10: M1B.4@2575,3354.92 M1B.4 2574.8,3265.2 2670,3170 2670,3090 2655.26,3075.26 2617.43,3075.26 U1B.7
NetM1B_5: M1B.5 U1B.12 | length 697.9
  Top Layer w10: U1B.12 2452.8,3022.8 v1(2470,3040) ; M1B.5 2650,3354.33 2650,3240 2705,3185 2705,3080 2675,3050 v1(2675,3005)
  Bottom Layer w10: v1(2470,3040) 2505,3005 v1(2675,3005)
NetM1B_6: M1B.6 U1B.6 | length 1103.7
  Top Layer w10: v1(2500,3085) 2525,3085 2561.61,3048.39 U1B.6 ; M1B.6 2650,3944.88 v1(2650,3530)
  Bottom Layer w10: v1(2500,3085) 2500,3465 2565,3530 v1(2650,3530)
NetM1B_7: M1B.7 U1B.5 | length 1032.6
  Top Layer w10: v1(2520,3045) 2542.2,3022.8 U1B.5 ; M1B.7 2580,3940.08 v1(2580,3460)
  Bottom Layer w10: v1(2520,3045) 2580,3105 v1(2580,3460)
NetM1B_9: M1B.9 U1B.10 | length 1039.1
  Top Layer w10: v1(2320,3075) 2382.83,3075 U1B.10 ; v1(2425,3500) 2425,3925.08 2420,3930.08 2430,3940.08 2425,3945.08 M1B.9
  Bottom Layer w10: v1(2320,3075) 2320,3485 2335,3500 v1(2425,3500)
NetM1B_10: M1B.10 U1B.11 | length 986.1
  Top Layer w10: v1(2350,3465) 2350,3944.88 M1B.10 ; U1B.11 2418.39,3048.39 v1(2450,3080)
  Bottom Layer w10: v1(2350,3465) 2350,3180 v1(2450,3080)
NetM1C_1: M1C.1 U1C.9 | length 349.4
  Top Layer w10: M1C.1@2750,3355.12 M1C.1 2750.39,3184.61 2835.43,3099.57 U1C.9
NetM1C_2: M1C.2 U1C.8 | length 465.4
  Top Layer w10: M1C.2@2825,3354.92 M1C.2 2825.2,3254.8 2980.43,3099.57 U1C.8
NetM1C_4: M1C.4 U1C.7 | length 491.3
  Top Layer w10: M1C.4@2975,3354.92 M1C.4 2975,3354.53 2975,3170 3005,3140 3150,3140 3175,3115 3175,3085 3163.98,3073.98 U1C.7
NetM1C_5: M1C.5 U1C.12 | length 491.4
  Top Layer w10: U1C.12 2962.2,3022.8 v1(2975,3010) ; v1(3045,3175) 3045,3350.12 M1C.5
  Bottom Layer w10: v1(2975,3010) 3025,3010 3045,3030 v1(3045,3175)
NetM1C_6: M1C.6 U1C.6 | length 1014.5
  Top Layer w10: M1C.6 3050,3944.88 3050,3495 3110,3435 3110,3220 3200,3130 3200,3080 3168.7,3048.7 3126.46,3048.7 U1C.6
NetM1C_7: M1C.7 U1C.5 | length 1194
  Top Layer w10: M1C.7 2974.8,3495.2 v1(2975,3495) ; U1C.5 3127.43,3024.08 3174.08,3024.08 3225,3075 3225,3150 3145,3230 v1(3145,3495)
  Bottom Layer w10: v1(2975,3495) v1(3145,3495)
NetM1C_9: M1C.9 U1C.10 | length 985.8
  Top Layer w10: v1(2825,3470) 2825,3945.08 M1C.9 ; U1C.10 2894.37,3074.49 2954.49,3074.49 v1(2955,3075)
  Bottom Layer w10: v1(2825,3470) 2825,3205 v1(2955,3075)
NetM1C_10: M1C.10 U1C.11 | length 1176.3
  Top Layer w10: v1(2750,3465) 2750,3944.88 M1C.10 ; U1C.11 2983.39,3048.39 v1(3005,3070)
  Bottom Layer w10: v1(2750,3465) 2750,3225 2925,3050 2983.99,3050 3003.99,3070 v1(3005,3070)
NetR1A_2: R1A.2 U1A.15 | length 136.9
  Top Layer w10: R1A.2 1797.44,2946.02 U1A.15
NetR1B_2: R1B.2 U1B.15 | length 157.7
  Top Layer w10: R1B.2 2280,3013.46 2280,2985 2318.98,2946.02 U1B.15
NetR1C_2: R1C.2 U1C.15 | length 149.4
  Top Layer w10: R1C.2 2803.46,2971.54 2828.98,2946.02 U1C.15
NetR2_1: R2.1 U2.1 | length 120.4
  Top Layer w20: R2.1 U2.1
NetR4_1: R4.1 R5.2 | length 80.9
  Top Layer w10: R5.2 3503.35,3521.06 3503.35,3598.94 R4.1
NetR9_2: R9.2 R10.1 | length 80
  Top Layer w10: R10.1 R9.2
NetU1A_14: U1A.14 U1B.2 | length 890.5
  Top Layer w6: U1A.14 1888.39,2971.61 1905,2955 v1(1905,2935) ; v1(2550,2945) 2615.12,2945 U1B.2
  Bottom Layer w6: v1(1905,2935) 1905,2970 1935,3000 2025,3000 2105,2920 2525,2920 v1(2550,2945)
NetU1B_14: U1B.14 U1C.2 | length 791
  Top Layer w6: U1B.14 2428.39,2971.61 v1(2450,2950) ; v1(3065,2925) 3086.02,2946.02 U1C.2
  Bottom Layer w6: v1(2450,2950) 2505,2950 2530,2975 2570,2975 2620,2925 v1(3065,2925)
NetU1C_14: U1C.14
NRST: C4.2 CON2.10 U3.6 U6.6 | length 3406.4
  Top Layer w6: U6.6 1122.6,1637.6 1140,1655 1175,1655 1195,1675 1195,2760 1270,2835 1470,2835 1645,2660 1645,2630 1662,2613 1847,2613 1872.8,2587.2 U3.6 1872.8,2322.8 1850,2300 C4.2
  Top Layer w10: U6.6 1085,1555.55 1085,1390 1135,1340 1390,1340 1430,1300 1430,1240 1490,1180 1690,1180 1700,1190 CON2.10
OE: U1A.13 U1B.13 U1C.13 U3.13 | length 1973.8
  Top Layer w6: U1A.13 1882.8,2997.2 1950,2930 1950,2835 ; U3.13 1923.98,2808.98 1950,2835 ; U1B.13 2447.8,2997.2 2485,2960 2485,2910 2417.5,2842.5 v1(2395,2865) 2350,2865 2325,2840 2325,2785 2315,2775 2095,2775 2035,2835 1950,2835 ; v1(2455,2805) 2485,2775 2865,2775 2960,2870 2960,2975 2937.8,2997.2 U1C.13
  Bottom Layer w6: v1(2395,2865) v1(2455,2805)
SDI: U1A.2 U3.14 | length 427.5
  Top Layer w6: U3.14 1899.19,2756.95 1899.19,2829.19 v1(1900,2830) ; v1(1990,2895) 2041.02,2946.02 U1A.2
  Bottom Layer w6: v1(1900,2830) 1900,2800 1930,2770 1970,2770 1990,2790 v1(1990,2895)
SWCLK: CON2.4 R8.1 U3.19 U6.3 | length 2641.8
  Top Layer w6: v1(1150,1705) 1150,2775 1310,2935 1420,2935 1433.46,2921.54 R8.1 1480.75,2874.25 1545,2810 1755,2810 1770.43,2794.57 U3.19
  Top Layer w10: v1(1205,1540) 1205,1535.13 1197.4,1527.53 U6.3 1197.4,1442.6 1230,1410 1470,1410 1550,1330 CON2.4
  Bottom Layer w10: v1(1150,1705) 1205,1650 v1(1205,1540)
SWDIO: CON2.2 U3.18 U6.1 | length 2785.7
  Top Layer w6: v1(1105,1705) 1105,2790 1285,2970 1435,2970 1570,2835 1760,2835 1796.02,2798.98 U3.18
  Top Layer w10: v1(1160,1540) 1135,1540 1122.6,1527.6 U6.1 1122.6,1417.4 1165,1375 1445,1375 1500,1320 CON2.2
  Bottom Layer w10: v1(1105,1705) 1160,1650 v1(1160,1540)
SWO: CON2.6 U6.4 | length 640.8
  Top Layer w10: U6.4 1245,1545.55 1245,1460 1260,1445 1495,1445 1600,1340 CON2.6
THERMO: R3.2 R5.1 TP4.1 U2.2 U3.7 | length 4852.2
  Top Layer w10: v1(1460,3140) TP4.1 1460,3233.46 1460,3285 1550,3375 1550,4030 1675,4155 3290,4155 3630,3815 3630,3540 3610,3520 R5.1 ; v1(1695,2645) 1855,2645 1898.39,2601.61 U3.7
  Top Layer w20: U2.2 R3.2 TP4.1@1460,3233.46
  Bottom Layer w10: v1(1460,3140) 1460,2925 1555,2830 1700,2830 1745,2785 1745,2695 v1(1695,2645)
VBAT: C2A.1 C2B.1 C2C.1 C8.1 M1A.3 M1A.8 M1B.3 M1B.8 M1C.3 M1C.8 R9.1 SW1.2 TP7.1 U5.3 | length 7318
  Top Layer w10: R9.1 2270,2660 2370,2560 TP7.1
  Top Layer w20: M1A.3 v1(2100,3685) M1A.8 2100,4085 C2A.1 ; M1B.3 v1(2500,3685) 2500,3930 M1B.8@2500.77,3930.77 ; M1B.8 2500,4080 C2B.1 ; C2C.1 2898.27,4078.27 2898.27,4040 ; M1C.3 v1(2900,3685) M1C.8 2898.27,3947.01 2898.27,4040 ; TP7.1 3234.72,2564.72 3375,2564.72 ; C8.1 3530,2430 ; SW1.2 3855,1700 3790,1765 3790,2170 3530,2430 ; 2898.27,4040 3215,4040 3375,3880 3375,2564.72 ; 3375,2564.72 3510.12,2564.72 U5.3 3530,2554.29 3530,2430
  Bottom Layer w20: v1(2100,3685) v1(2500,3685) v1(2900,3685)
VSENSE: C10.1 R10.2 R11.1 TP9.1 U3.9 | length 744.1
  Top Layer w10: U3.9 1949.57,2564.57 1965,2580 2005,2580 2045,2540 2203.46,2540 ; C10.1 R11.1 ; R10.2 2203.46,2540 ; TP9.1 R11.1 ; R11.1 2203.46,2540
VSLIDER: C3.1 POT1.2 TP2.1 U3.8 | length 2106.4
  Top Layer w10: v1(1250,2250) 1250,1729.53 POT1.2 ; v1(1390,2250) 1660,2250 1705,2205 1965,2205 2006.54,2246.54 ; U3.8 1923.98,2336.02 1960,2300 C3.1 2006.54,2246.54 ; TP2.1 2225,2300 2171.54,2246.54 2006.54,2246.54
  Bottom Layer w10: v1(1250,2250) v1(1390,2250)
pads on no net: CON2.7 CON2.8 POT1.SH SW1.1 SW1.SH U3.1 U3.2 U3.3 U3.10 U3.15 U3.20 U4.7

## Polygon pours and split planes (outlines as drawn)
no net on Top Solder "NONET_L-01_P-001" (solid): 2350,1000 2350,1450 3600,1450 3600,1000
no net on Top Solder "NONET_L-01_P-001" (solid, pour order 4): 2350,1000 2350,1450 3600,1450 3600,1000
GND on Bottom Layer "GND_L02_P000" (solid, pour order 0): 1000,4500 4000,4500 4000,1000 1000,1000
3V3 on Top Layer "3V3_L01_P002" (solid, pour order 2): 1000,4500 1000,1000 4000,1000 4000,4500

## Keep-outs
Top Layer:
  region: 1950,1450 1950,1000 3600,1000 3600,1450
Bottom Layer:
  region: 1950,1450 3600,1450 3600,1000 1950,1000

## Silkscreen, mask and mechanical layers (free items; w line width, h text height)
Top Overlay:
  circle w45: c3460,1130 r20
  lines w6: 3485,1210 3500,1210 ; 3485,1230 3500,1230 ; 3485,1250 3500,1250 ; 3485,1270 3500,1270 ; 3485,1290 3500,1290 ; 3485,1310 3500,1310 ; 3485,1330 3500,1330
  lines w10: 3420,1197.08 ccw(c3460,1130) 3500,1197.08 3500,1350 ccw(c3460,1350) 3420,1350 3420,1197.08
  lines w20: 3460,1130 3460,1310
  text "open" at 2435,1274.32 h100
  text "Ther" at 2789.87,1220 h100
  text "mo" at 3169.74,1220 h100
  text "NathanPet" at 2417,1162 h55
  text "er" at 2887,1161.16 h55
  text "sen." at 2987,1161.16 h55
  text "com" at 3170,1140 h55
  text "REV20201004A" at 2864,1069 h40
Bottom Overlay:
  text "AA" at 1900,3150 h200
  text "AA" at 2500,3150 h200
  text "AA" at 3100,3150 h200
  text "AA" at 3700,3150 h200
Mechanical 1:
  the board outline again, w1